# Altium PCB IEPE_PCB.PcbDoc
Units mm, origin at the board's own origin, x right, y up, seen from the top; angles counter-clockwise.
Board outline 36.69 x 60 mm, 2 copper layers (Top Layer, Bottom Layer); 86 components, 73 nets, 277 pads, 2 vias.
Unrouted connection lines stored in the file: 116.
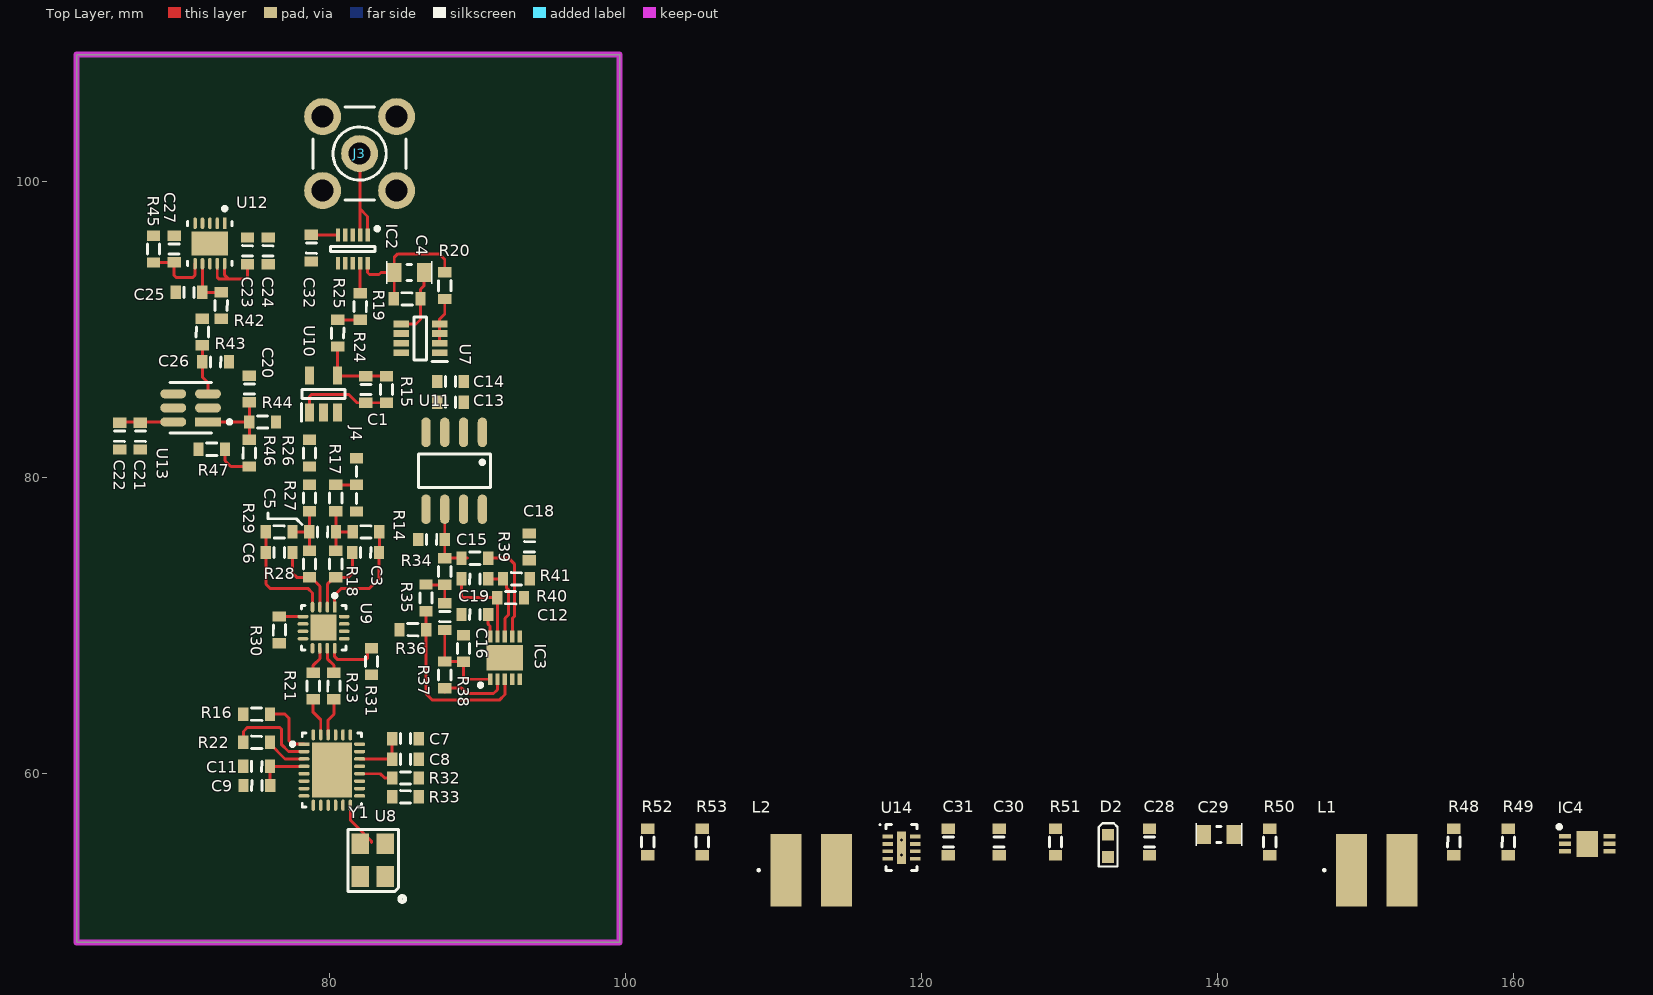
[diagram p0: Top Layer view]
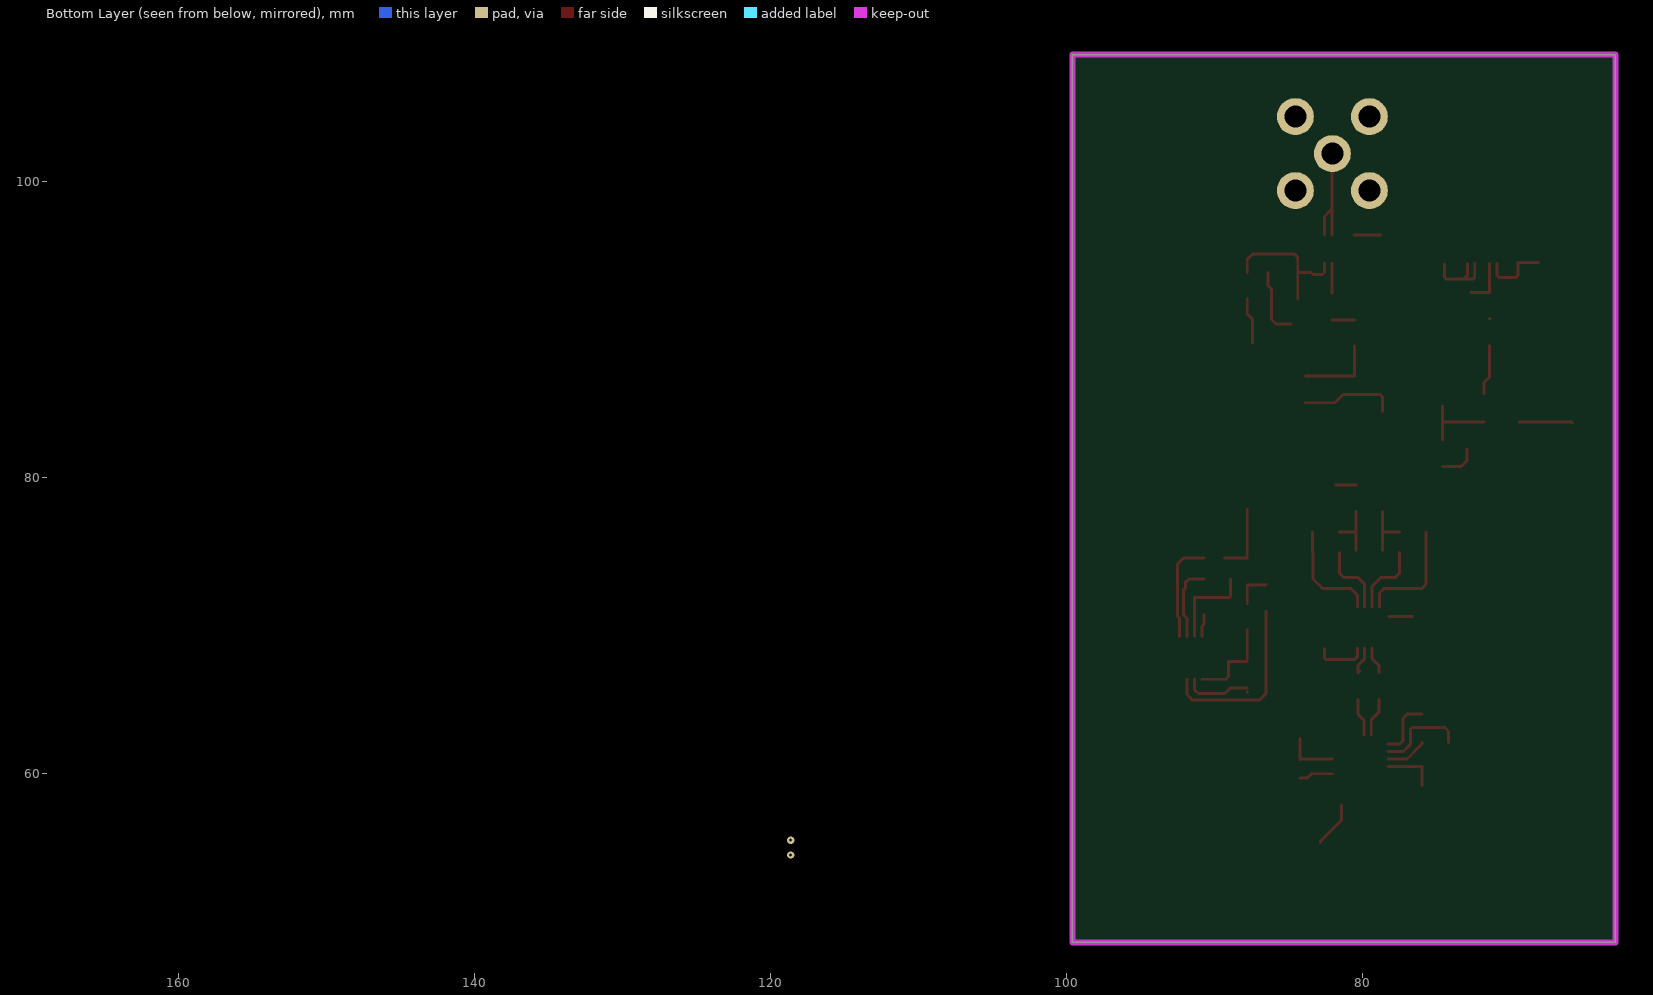
[diagram p1: Bottom Layer view, seen from below]

## Layer stack, top to bottom
Top Solder: solder mask 0.0102, Solder Resist, Dk 3.5
Top Layer: signal copper 0.0356
Dielectric 1: dielectric 0.32, FR-4, Dk 4.8
Bottom Layer: signal copper 0.0356
Bottom Solder: solder mask 0.0102, Solder Resist, Dk 3.5

## Board outline
62.875,48.585 62.875,108.585 99.568,108.585 99.568,48.585

## Design rules (kind name [scope] priority, off if disabled: settings)
Clearance [All] p1: gap=0.1 ignorepadtopadclearanceinfootprint=FALSE
MatchedLengths [InNetClass('QSPI')] p1: tolerance=2.54 checknetsindiffpair=FALSE checkdiffpairvsdiffpair=TRUE checkxsignals=TRUE checkothers=TRUE
PolygonConnect [All] p1: connectstyle=Relief reliefconductorwidth=0.254 reliefentries=4 polygonreliefangle="90 Angle" airgapwidth=0.254
RoutingVias [All] p1: holewidth=0.4 width=0.8 viastyle="Through Hole" minholewidth=0.4 minwidth=0.8 maxholewidth=0.5 maxwidth=1
SolderMaskExpansion [All] p1: expansion=0.102 istentingtop=FALSE
Width [All] p1: maxlimit=0.3 minlimit=0.2 preferedwidth=0.2
30 further rules are at their usual default settings.

## Classes and differential pairs
component class POWER: C28 C29 C30 C31 D2 IC4 L1 L2 R48 R49 R50 R51 R52 R53 U14
component class TOP: P1
component class IEPE1: C1 C3 C4 C5 C6 C7 C8 C9 C11 C12 C13 C14 C15 C16 C18 C19 C20 C21 C22 C23 C24 C25 C26 C27 C32 IC2 IC3 J3 J4 R14 R15 R16 R17 R18 R19 R20 R21 R22 R23 R24 R25 R26 R27 R28 R29 R30 R31 R32 R33 R34 R35 R36 R37 R38 R39 R40 R41 R42 R43 R44 R45 R46 R47 U7 U8 U9 U10 U11 U12 U13 Y1

## Components (designator, comment, footprint, x,y, rotation, side; value= is the part's Value field where it differs from the comment)
C1 "58pF" C603 82.423,85.955 r90 top
C3 "1000pF" C603 82.412,74.93 r0 top
C4 "10uF" C805 85.344,93.853 r0 top
C5 "1800pF" C603 79.502,76.327 r180 top
C6 "1000pF" C603 76.57,74.93 r180 top
C7 "1uF" C603 85.101,62.357 r0 top
C8 "100nF" C603 85.101,60.96 r0 top
C9 "1uF" C603 75.057,59.182 r180 top
C11 "100nF" C603 75.046,60.483 r180 top
C12 "470nF" C603 87.757,70.601 r90 top
C13 "100nF" C603 88.138,85.09 r180 top
C14 "1uF" C603 88.138,86.487 r180 top
C15 "100nF" C603 86.868,75.819 r180 top
C16 "100nF" C603 89.789,70.739 r180 top
C18 "22uF" C603 93.472,75.322 r90 top
C19 "4.7uF" C603 89.789,73.152 r0 top
C20 "1.5uF" C603 74.549,85.99 r270 top
C21 "100nF" C603 67.183,82.793 r270 top
C22 "1uF" C603 65.786,82.793 r270 top
C23 "100nF" C603 74.422,95.322 r90 top
C24 "2.2uF" C603 75.819,95.322 r90 top
C25 "100nF" C603 70.474,92.517 r180 top
C26 "3.3uF" C603 72.274,87.818 r0 top
C27 "10uF" C603 69.469,95.449 r90 top
C28 "47pF" c603 135.382,55.372 r90 top
C29 "4.7uF" C805 140.081,55.88 r0 top
C30 "1uF" c603 125.222,55.372 r90 top
C31 "470nF" c603 121.793,55.372 r90 top
C32 "100nF" C603 78.74,95.504 r270 top
D2 "LED" led-0603 132.588,54.356 r90 top
IC2 "ADG5421FBCPZ-RL7" SON50P200X300X80-10N-D 81.542,95.443 r270 top
IC3 "ADA4807-2ACPZ-R2" SON50P300X300X80-11N-D 91.821,67.818 r90 top
IC4 "LTC3459EDCB#PBF" SON50P300X200X80-7N-D 164.973,55.245 r0 top
J3 "CONN-2" SMB-ANT 82.002,101.894 r180 top
J4 "jumper" jumper-3-SMD 81.788,81.302 r180 top
L1 "VLCF5028T-330MR62-2" VLCF5028 150.749,53.467 r0 top
L2 "VLCF5028T-150MR85-2" VLCF5028 112.522,53.467 r0 top
R14 "2K" R0603 82.434,76.327 r180 top
R15 "15K" R0603 83.82,85.955 r90 top
R16 "10K" R0603 75.046,64.008 r0 top
R17 "750" R0603 80.391,78.613 r90 top
R18 "374" R0603 80.391,74.157 r90 top
R19 "10K" R0603 85.217,92.075 r0 top
R20 "270" R0603 87.757,92.964 r270 top
R21 "82.5" R0603 78.867,65.913 r90 top
R22 "0" R0603 75.046,62.103 r180 top
R23 "82.5" R0603 80.264,65.913 r90 top
R24 "0" R0603 82.042,91.556 r90 top
R25 "49.9K" R0603 80.518,89.756 r90 top
R26 "0" R0603 78.613,81.65 r90 top
R27 "750" R0603 78.613,78.613 r90 top
R28 "374" R0603 78.613,74.157 r90 top
R29 "2K" R0603 76.57,76.327 r0 top
R30 "2K" R0603 76.581,69.712 r90 top
R31 "2K" R0603 82.804,67.575 r90 top
R32 "0" R0603 85.101,59.69 r180 top
R33 "0" R0603 85.101,58.42 r180 top
R34 "3.3K" R0603 87.757,73.649 r90 top
R35 "3.3K" R0603 86.487,71.871 r90 top
R36 "10.2K" R0603 85.598,69.723 r180 top
R37 "100" R0603 87.757,66.664 r90 top
R38 "4.7K" R0603 89.019,68.453 r90 top
R39 "1K" R0603 89.789,74.549 r0 top
R40 "100" R0603 92.213,71.882 r0 top
R41 "1K" R0603 92.594,73.152 r0 top
R42 "4.7K" R0603 72.644,91.628 r270 top
R43 "50" R0603 71.374,89.839 r270 top
R44 "0" R0603 75.449,83.759 r0 top
R45 "100" R0603 68.072,95.438 r90 top
R46 "2.7K" R0603 74.549,81.65 r90 top
R47 "2.7K" R0603 72.009,81.915 r0 top
R48 "0" R0603 155.956,55.372 r90 top
R49 "1K" R0603 159.639,55.372 r90 top
R50 "1M" R0603 143.51,55.372 r90 top
R51 "210K" R0603 129.032,55.372 r90 top
R52 "3.9M" R0603 101.473,55.372 r90 top
R53 "78.7K" R0603 105.156,55.372 r90 top
U7 "LT3092ETS8#TRMPBF" SOT65P280X100-8N 86.106,89.408 r180 top
U8 "AD7768-1BCPZ" FP-CP-28-12-IPC_C 80.125,60.233 r0 top
U9 "ADA4945-1ACPZ-R7" FP-CP-16-22-IPC_C 79.568,69.856 r270 top
U10 "AD8605ARTZ-REEL7" SOT95P280X145-5N 79.568,85.655 r90 top
U11 "ADR4540BRZ" SOIC-8N 90.297,83.058 r270 top
U12 "LTC2606IDD-1#PBF" FP-DD-10-05-08-1699-IPC_C 71.882,95.819 r270 top
U13 "ADA4807-1ARJZ-R2" FP-RJ-6-IPC_A 70.58,84.709 r180 top
U14 "LT3494EDDB#TRMPBF" LT-DDB-8_V 118.618,54.991 r0 top
Y1 "50 MHz" OSC3225 83.742,53.045 r270 top

## Footprints (in the part's own frame and the unit in brackets; to place one, negate y for a bottom-side part, rotate by r counter-clockwise, add the part's x,y. Pads: shape width x height; smd on the part's side, far side on the other; paste and mask are expansions set on the pad)
C603 [mm]
  rect 0.7x0.9 smd: 1(-0.9,0) 2(0.9,0)
  silkscreen extent -0.35,-0.34 0.35,0.34, body extent -0.76,-0.38 0.76,0.38, height 0.6
c603 [mm]
  rect 0.7x0.9 smd: 1(-0.9,0) 2(0.9,0)
  silkscreen extent -0.35,-0.34 0.35,0.34, body extent -0.76,-0.38 0.76,0.38, height 0.6
C805 [mm]
  rect 0.95x1.3 smd: 1(-1,0) 2(1,0)
  silkscreen extent -1.52,-0.76 1.52,0.76, body extent -1,-0.62 1,0.63, height 0.78
FP-CP-16-22-IPC_C [mm]
  rect 0.731x0.239 smd paste+0 mask+0: 1(-1.391,0.75)
  rrect100% 0.731x0.239 smd paste+0 mask+0: 2(-1.391,0.25) 3(-1.391,-0.25) 4(-1.391,-0.75) 9(1.391,-0.75) 10(1.391,-0.25) 11(1.391,0.25) 12(1.391,0.75)
  rrect100% 0.239x0.731 smd paste+0 mask+0: 5(-0.75,-1.391) 6(-0.25,-1.391) 7(0.25,-1.391) 8(0.75,-1.391) 13(0.75,1.391) 14(0.25,1.391) 15(-0.25,1.391) 16(-0.75,1.391)
  rect 1.75x1.75 smd paste-1000 mask+0: 17(0,0)
  silkscreen extent -2.28,-1.5 1.5,1.5, body extent -1.86,-1.86 1.86,1.86, height 0.25
FP-CP-28-12-IPC_C [mm]
  rect 0.756x0.239 smd paste+0 mask+0: 1(-1.878,1.75)
  rrect100% 0.756x0.239 smd paste+0 mask+0: 2(-1.878,1.25) 3(-1.878,0.75) 4(-1.878,0.25) 5(-1.878,-0.25) 6(-1.878,-0.75) 7(-1.878,-1.25) 8(-1.878,-1.75) 15(1.878,-1.75) 16(1.878,-1.25) 17(1.878,-0.75) 18(1.878,-0.25) 19(1.878,0.25) 20(1.878,0.75) 21(1.878,1.25) 22(1.878,1.75)
  rrect100% 0.239x0.756 smd paste+0 mask+0: 9(-1.25,-2.378) 10(-0.75,-2.378) 11(-0.25,-2.378) 12(0.25,-2.378) 13(0.75,-2.378) 14(1.25,-2.378) 23(1.25,2.378) 24(0.75,2.378) 25(0.25,2.378) 26(-0.25,2.378) 27(-0.75,2.378) 28(-1.25,2.378)
  rect 2.7x3.7 smd paste-1000 mask+0: 29(0,0)
  silkscreen extent -2.78,-2.5 2,2.5, body extent -2.36,-2.86 2.36,2.86, height 0.25
FP-DD-10-05-08-1699-IPC_C [mm]
  rect 0.781x0.242 smd paste+0 mask+0: 1(-1.366,1)
  rrect100% 0.781x0.242 smd paste+0 mask+0: 2(-1.366,0.5) 3(-1.366,0) 4(-1.366,-0.5) 5(-1.366,-1) 6(1.366,-1) 7(1.366,-0.5) 8(1.366,0) 9(1.366,0.5) 10(1.366,1)
  rect 1.65x2.48 smd paste-1000 mask+0: 11(0,0)
  silkscreen extent -2.48,-1.5 1.5,1.5, body extent -1.86,-1.6 1.86,1.6, height 0.25
FP-RJ-6-IPC_A [mm]
  rect 1.756x0.612 smd paste+0 mask+0: 1(-1.175,0.95)
  rrect100% 1.756x0.612 smd paste+0 mask+0: 2(-1.175,0) 3(-1.175,-0.95) 4(1.175,-0.95) 5(1.175,0) 6(1.175,0.95)
  silkscreen extent -2.75,-1.7 1.4,1.7, body extent -2.55,-1.95 2.55,1.95, height 0.25
jumper-3-SMD [mm]
  rect 0.9x0.7 smd: 1(0,0) 2(0,1.8) 3(0,3.6)
  silkscreen extent -0.01,0.56 0.01,3.05, body extent -0.38,0.14 0.38,1.66, height 0.45
led-0603 [mm]
  rect 0.8x0.8 smd: 1(0,0) 2(1.5,0)
  silkscreen extent -0.64,-0.64 2.29,0.64, body extent -0.04,-0.41 1.56,0.38, height 0.7
LT-DDB-8_V [mm] "SON, 8-Leads, Body 3x2mm, Pitch 0.5mm, Thermal Pad 2.2x0.61mm"
  rect 0.7x0.25 smd mask+0.102: 1(-0.925,0.75) 2(-0.925,0.25) 3(-0.925,-0.25) 4(-0.925,-0.75) 5(0.925,-0.75) 6(0.925,-0.25) 7(0.925,0.25) 8(0.925,0.75)
  rect 0.61x2.2 smd mask+0.102: 9(0,0)
  silkscreen extent -1.5,-1.55 1.05,1.6, body extent -1,-1.5 1,1.5, height 0.8
OSC3225 [mm]
  rect 1.4x1.2 smd: 1(0,0) 2(-2.2,0) 3(-2.2,-1.7) 4(0,-1.7)
  silkscreen extent -3.17,-2.54 1.7,1.32, body extent -2.62,-2.14 0.58,0.36, height 1
R0603 [mm]
  rect 0.7x0.9 smd: 1(-0.9,0) 2(0.9,0)
  silkscreen extent -0.34,-0.42 0.34,0.42, body extent -0.76,-0.38 0.76,0.38, height 0.45
SMB-ANT [mm]
  round 2.5 hole 1.5: 1(0,0) 2(-2.5,2.5) 2(-2.5,-2.5) 2(2.5,2.5) 2(2.5,-2.5)
  silkscreen extent -3.15,-3.15 3.15,3.15, body extent -2.63,-11.37 2.57,2.63, height 9.9
SOIC-8N [mm] "SOIC, 8-Leads, Body 4.9x3.9mm, Pitch 1.27mm, IPC Low Density"
  oval 2x0.625 smd: 1(0,0) 2(0,-1.27) 3(0,-2.54) 4(0,-3.81) 5(5.2,-3.81) 6(5.2,-2.54) 7(5.2,-1.27) 8(5.2,0)
  silkscreen extent 1.48,-4.32 3.73,0.57, body extent -0.57,-4.43 5.6,0.57, height 2
SON50P200X300X80-10N-D [mm]
  rect 0.85x0.3 smd: 1(-0.95,1) 2(-0.95,0.5) 3(-0.95,0) 4(-0.95,-0.5) 5(-0.95,-1) 6(0.95,-1) 7(0.95,-0.5) 8(0.95,0) 9(0.95,0.5) 10(0.95,1)
  silkscreen extent -1.5,-1.5 0.18,1.78, body extent -1.05,-1.5 1.05,1.5, height 0.8
SON50P300X200X80-7N-D [mm]
  rect 0.8x0.3 smd: 1(-1.5,0.5) 2(-1.5,0) 3(-1.5,-0.5) 4(1.5,-0.5) 5(1.5,0) 6(1.5,0.5)
  rect 1.45x1.75 smd: 7(0,0)
  silkscreen extent -2.02,1.03 -1.77,1.27, body extent -1.55,-1 1.55,1, height 0.8
SON50P300X300X80-11N-D [mm]
  rect 0.8x0.3 smd: 1(-1.45,1) 2(-1.45,0.5) 3(-1.45,0) 4(-1.45,-0.5) 5(-1.45,-1) 6(1.45,-1) 7(1.45,-0.5) 8(1.45,0) 9(1.45,0.5) 10(1.45,1)
  rect 1.74x2.48 smd: 11(0,0)
  silkscreen extent -1.97,1.52 -1.73,1.77, body extent -1.55,-1.5 1.55,1.5, height 0.8
SOT65P280X100-8N [mm]
  rect 1.05x0.45 smd: 1(-1.3,0.975) 2(-1.3,0.325) 3(-1.3,-0.325) 4(-1.3,-0.975) 5(1.3,-0.975) 6(1.3,-0.325) 7(1.3,0.325) 8(1.3,0.975)
  silkscreen extent -1.83,-1.45 0.43,1.55, body extent -1.4,-1.45 1.4,1.45, height 1
SOT95P280X145-5N [mm]
  rect 1.2x0.6 smd: 1(-1.25,0.95) 2(-1.25,0) 3(-1.25,-0.95) 4(1.25,-0.95) 5(1.25,0.95)
  silkscreen extent -1.85,-1.45 0.3,1.5, body extent -1.4,-1.45 1.4,1.45, height 1.45
VLCF5028 [mm]
  rect 2.1x4.9 smd: 1(-1.7,0) 2(1.7,0)
  silkscreen extent -3.6,-0.05 -3.5,0.05, body extent -2.58,-2.5 2.58,2.5, height 2.8

## Part data
C1 C3 C4 C5 C6 C7 C8 C9 C11 C12 C13 C14 C15 C16 C18 C19 C20 C21 C22 C23 C24 C25 C26 C27 C28 C29 C30 C31 C32: library part Cap, "Capacitor", Designer="Parsa Malekpour"
IC2: "Integrated Circuit", Manufacturer_Name="Analog Devices", Mouser Part Number=584-ADG5421FBCPZ-RL7, Arrow Part Number=ADG5421FBCPZ-RL7, Arrow Price/Stock=https://www.arrow.com/en/products/adg5421fbcpz-rl7/analog-devices?region=nac, Datasheet Link=https://www.analog.com/ADG5421F/datasheet, Height=0.8mm, Manufacturer_Part_Number=ADG5421FBCPZ-RL7, Mouser Price/Stock=https://www.mouser.co.uk/ProductDetail/Analog-Devices/ADG5421FBCPZ-RL7?qs=T94vaHKWudQNcGWA2Nw7gg%3D%3D
IC3: "Integrated Circuit", Manufacturer_Name="Analog Devices", Mouser Part Number=584-ADA4807-2ACPZ-R2, Arrow Part Number=ADA4807-2ACPZ-R2, Arrow Price/Stock=null?region=nac, Datasheet Link=https://componentsearchengine.com/Datasheets/2/ADA4807-2ACPZ-R2.pdf, Height=0.8mm, Manufacturer_Part_Number=ADA4807-2ACPZ-R2, Mouser Price/Stock=https://www.mouser.co.uk/ProductDetail/Analog-Devices/ADA4807-2ACPZ-R2?qs=xbTpb2TSnD%2FWQQylmCBTow%3D%3D
IC4: "Integrated Circuit", Manufacturer_Name="Analog Devices", Mouser Part Number=584-LTC3459EDCB#PBF, Datasheet Link=https://eu.mouser.com/datasheet/2/609/3459fc-1268033.pdf, Height=0.8mm, Manufacturer_Part_Number=LTC3459EDCB#PBF, Mouser Price/Stock=https://www.mouser.co.uk/ProductDetail/Analog-Devices/LTC3459EDCBPBF?qs=oahfZPh6IAJQ4v4AGuZiZA%3D%3D
J4: library part "Triple Jumper", "Jumper wire"
L1: "Inductor", Manufacturer_Name=TDK, Mouser Part Number=810-VLCF528T330MR622, Datasheet Link=https://product.tdk.com/system/files/dam/doc/product/inductor/inductor/smd/catalog/inductor_commercial_power_vlcf5028-2_en.pdf, Manufacturer_Part_Number=VLCF5028T-330MR62-2, Mouser Price/Stock=https://www.mouser.co.uk/ProductDetail/TDK/VLCF5028T-330MR62-2?qs=uxmvvYJjMIsxJaGpQbGMMg%3D%3D
L2: "Inductor", Manufacturer_Name=TDK, Mouser Part Number=810-VLCF528T150MR852, Arrow Part Number=VLCF5028T-150MR85-2, Arrow Price/Stock=https://www.arrow.com/en/products/vlcf5028t-150mr85-2/tdk?region=nac, Datasheet Link=https://product.tdk.com/system/files/dam/doc/product/inductor/inductor/smd/catalog/inductor_commercial_power_vlcf5028-2_en.pdf, Manufacturer_Part_Number=VLCF5028T-150MR85-2, Mouser Price/Stock=https://www.mouser.co.uk/ProductDetail/TDK/VLCF5028T-150MR85-2?qs=uxmvvYJjMIszC3VRfNbrqA%3D%3D
R14 R15 R16 R17 R18 R19 R20 R21 R22 R23 R24 R25 R26 R27 R28 R29 R30 R31 R32 R33 R34 R35 R36 R37 R38 R39 R40 R41 R42 R43 R44 R45 R46 R47 R48 R49 R50 R51 R52 R53: library part Resistor, "Resistor", Designer="Parsa Malekpour"
U7: library part CMP-0472-00073-1, "200 mA Two-Terminal Programmable Current Source, 0.3 mA Isupply, 8-pin SOT23 (TS8-8), -40 to 125 degC, Pb-Free, Mini Tape and Reel", Extended Temp="E, I, MP", Manufacturer="Linear Technology", Output Current Range="0.5 mA to 200 mA", Code_JEDEC=MO-193, ComponentLink1Description="Manufacturer URL", ComponentLink1URL=http://www.linear.com/, ComponentLink2Description=Datasheet, ComponentLink2URL=http://cds.linear.com/docs/en/datasheet/3092fb.pdf, ComponentLink3Description="Package Specification", ComponentLink3URL=http://cds.linear.com/docs/en/packaging/SOT_8_05-08-1637.pdf, DatasheetVersion="Rev. B", Initial Accuracy(%)=1, Isupply(mA)=0.3, Mounting Technology="Surface Mount", PackageDescription="8-Pin Plastic TSOT-23, Body 2.9 x 1.63 mm, Pitch 0.65 mm", PackageReference=TS8-8, PackageVersion="Rev. A, 08/2010", Packing="Mini Tape and Reel", PartNumber=LT3092ETS8#TRMPBF, RoHS=TRUE, Vin Max(V)=40, Vin Min(V)=1.2
U8: library part CMP-09081-000087-1, "IC ADC 24BIT SIGMA-DELTA 28LFCSP", Max Operating Temperature=125°C, Min Operating Temperature=-40°C, Interface=SPI, Number of A/D Converters=1, Number of Bits=24, Number Of Inputs=1, Number of Pins=28, RoHS Compliant=Yes, Sampling Rate=1024000S/s
U9: "IC ADC DRIVER 16LFCSP", Number of Pins=16
U10: library part CMP-0384-01494-2, "Single Channel Wide Bandwidth Operational Amplifier, 10 MHz BW, 5 V/us SR, Industrial, 5-pin SOT23 (RJ-5), Reel", Amplifiers Per Package=1, Generic Part Number=AD8605, Input Bias Current=200fA, Input Offset Voltage=20uV, Manufacturer="Analog Devices", Code_JEDEC=MO-178-AA, ComponentLink1Description="Manufacturer URL", ComponentLink1URL=http://www.analog.com/en/index.html, ComponentLink2Description=Datasheet, ComponentLink2URL=http://www.analog.com/static/imported-files/data_sheets/AD8605_8606_8608.pdf, ComponentLink3Description="Package Specification", ComponentLink3URL=http://www.analog.com/static/imported-files/packages/PKG_PDF/SOT-23(RJ)/RJ_5.pdf, ComponentLink4Description="Reference Circuit", ComponentLink4URL=http://www.analog.com/en/all-operational-amplifiers-op-amps/operational-amplifiers-op-amps/ad8605/products/product.html#product-recommendations, DatasheetVersion="Rev. L", Iq/Amp=1.2mA, Mounting Technology="Surface Mount", PackageDescription="5-Pin Small Outline Transistor Package, Body 2.9 x 1.6 mm, Pitch 0.95 mm", PackageReference=RJ-5, PackageVersion=121608-A, PartNumber=AD8605ARTZ-REEL7, RevisionNote="Reference Circuit URL fixed", Slew Rate=5V/us, Small Signal Bandwidth=10MHz, V Span Max=6V, V Span Min=2.7V
U11: library part CMP-0784-00192-1, "Ultralow Noise, High Accuracy Voltage Reference, 4.096 V Output, 3 to 15 V Supply, Industrial, 8-pin SOIC (R-8), Tube", Manufacturer="Analog Devices", Operating Temp Range="-40 to 125 degC", Code_JEDEC=MS-012-AA, ComponentLink1Description="Manufacturer URL", ComponentLink1URL=http://www.analog.com/en/index.html, ComponentLink2Description=Datasheet, ComponentLink2URL=http://www.analog.com/static/imported-files/data_sheets/ADR4520_4525_4530_4533_4540_4550.pdf, ComponentLink3Description="Package Specification", ComponentLink3URL=http://www.analog.com/static/imported-files/packages/PKG_PDF/SOIC_Narrow%20(R)/R_8.pdf, ComponentLink4Description="URL Link1", ComponentLink4URL="Product URL:http://www.analog.com/en/special-linear-functions/voltage-references/adr4540/products/product.html", DatasheetVersion="Rev. 0", Max V Supply (V)=15, Min V Supply (V)=3, Mounting Technology="Surface Mount", PackageDescription="8-Pin Standard Small Outline Package, Body 4.9 x 3.9 mm, Pitch 1.27 mm", PackageReference=R-8, PackageVersion="060506-A, 06/2006", Packing=Tube, PartNumber=ADR4540BRZ, Ref Out TC (ppm/C)=2, Vout=4.096V
U12: library part CMP-09082-000079-1, "IC DAC 16BIT V-OUT 10DFN", Case/Package=DFN, Max Operating Temperature=85°C, Max Supply Voltage=5.5V, Min Operating Temperature=-40°C, Min Supply Voltage=2.7V, Nominal Supply Current=340uA, Package Quantity=121, Integral Nonlinearity (INL)=64LSB, Interface=I2C, Lead Free="Lead Free", Mount="Surface Mount", Number of Bits=16, Number of Channels=1, Number of Converters=1, Number of Pins=10, Output Type=Voltage, Packaging=Rail/Tube, REACH SVHC="No SVHC", Resolution=16b, RoHS Compliant=Yes, Settling Time=10us, Supply Current=340uA, Supply Type=Single
U13: library part CMP-09116-000179-1, "IC OPAMP VFB 1 CIRCUIT SOT23-6", Case/Package=SOT-23-6, Dual Supply Voltage=5V, Input Bias Current=1.2uA, Input Offset Voltage (Vos)=20uV, Max Frequency=100kHz, Max Input Voltage=11V, Max Operating Temperature=125°C, Min Input Voltage=2.7V, Min Operating Temperature=-40°C, Min Supply Voltage=3V, Operating Supply Current=950uA, Operating Supply Voltage=10V, Output Current=60mA, Output Current per Channel=106mA, Power Supply Rejection Ratio (PSRR)=105dB, Voltage Gain=130dB, -3db Bandwidth=180MHz, Bandwidth=200MHz, Common Mode Rejection Ratio=96dB, Contact Plating=Tin, Gain Bandwidth Product=200MHz, Height=1.3mm, Lead Free="Contains Lead", Length=3mm, Max Supply Voltage=11V, Mount="Surface Mount", Number of Amplifiers=1, Number Of Circuits=1, Number of Pins=6, Packaging="Cut Tape", REACH SVHC="No SVHC", RoHS Compliant=Yes, Slew Rate=225V/µs, Width=1.7mm
U14: library part CMP-0491-00356-1, "Micropower Low Noise Boost Converter with Output Disconnect, 8-pin SON (DDB-8), -40 to 85 degC, Pb-Free, Mini Tape and Reel", Manufacturer="Linear Technology", Code_JEDEC=MO-229, ComponentLink1Description="Manufacturer URL", ComponentLink1URL=http://www.linear.com/, ComponentLink2Description=Datasheet, ComponentLink2URL=http://cds.linear.com/docs/en/datasheet/3494fb.pdf, ComponentLink3Description="Package Specification", ComponentLink3URL=http://cds.linear.com/docs/en/packaging/DFN_8_05-08-1702.pdf, DatasheetVersion="Rev. B", Mounting Technology="Surface Mount", Number Of Outputs=1, PackageDescription="8-Pin Plastic DFN, Body 3 x 2 mm, Pitch 0.5 mm", PackageReference=DDB-8, PackageVersion="Rev. B, 06/2010", Packing="Mini Tape and Reel", PartNumber=LT3494EDDB#TRMPBF, RoHS=TRUE
Y1: library part OSCILLATOR, "OSCILLATOR", Frequency="50 MHz"

## Via types
v1: diameter 0.5, hole 0.2, Top Layer to Bottom Layer, 2 vias

## Nets (pads, with @x,y where several pads share a name; then routed paths per layer and width w, separated by ;. In a path a pad name is that pad's centre, name@x,y a point inside that pad or via, vN(x,y) a via of type N, cw(c..) or ccw(c..) an arc to the next point about the centre after c; other vN are vias at no path point)
3V3_DAC: C23.1 C24.1 U12.9 U12.10 | length 5.1
  Top Layer w0.2: U12.9 72.382,93.541 72.517,93.406 73.152,93.406 ; U12.10 72.882,93.676 73.152,93.406 ; C23.1 74.422,93.523 74.305,93.406 73.152,93.406
+3.3V: C30.2 IC4.1 IC4.6 L1.1 L2.1 U8.22 U14.3 U14.4 U14.5
+5V: C13.1 C14.1 C16.1 C21.1 C22.1 IC3.10 R30.1 R31.1 U8.23 U9.6 U9.7 U9.8 U10.5 U11.2 U13.6 | length 5.2
  Top Layer w0.2: C22.1 65.852,83.759 U13.6 ; C16.1 90.689,70.093 90.821,69.961 IC3.10
+7V: R48.2 R49.1
+26V: C32.1 IC2.5 U7.7 U7.8 | length 1.8
  Top Layer w0.2: C32.1 78.751,96.393 IC2.5
ADC_GPIO0: IC2.8 U8.15
ADC_GPIO1: IC2.7 U8.16
ADC_GPIO2: R33.2 U8.17
ADC_GPIO3: R32.2 U8.18 | length 2.3
  Top Layer w0.2: U8.18 83.4,59.983 83.693,59.69 R32.2
ADC_REF: C15.1 R34.2 R39.1 U11.6 | length 4.8
  Top Layer w0.2: U11.6 87.757,75.819 R34.2 89.281,74.549
ADC_RESET: R16.2 U8.1 | length 4
  Top Layer w0.2: R16.2 76.962,64.008 77.216,63.754 77.216,62.23 77.463,61.983 U8.1
DAC_BUF_EN: IC3.5 IC3.6 U13.5
DAC_OUT: C25.1 R42.1 U12.7 | length 3.2
  Top Layer w0.2: C25.1 C25.1@71.382,92.517 ; U12.7 C25.1@71.382,92.517 ; R42.1 72.633,92.517 C25.1@71.382,92.517
FDA_EN: R31.2 R33.1 U9.12 | length 3.6
  Top Layer w0.2: U9.12 80.318,67.891 80.518,67.691 82.423,67.691 82.55,67.818 R31.2@82.55,68.453
FDA_MODE: R30.2 R32.1 U9.5 | length 1.6
  Top Layer w0.2: R30.2 76.587,70.606 U9.5
FDA_OUT_N: R23.2 U9.11 | length 2
  Top Layer w0.2: U9.11 79.818,67.756 80.264,67.31 R23.2 R23.2@80.137,66.94
FDA_OUT_P: R21.2 U9.10 | length 1.8
  Top Layer w0.2: R21.2 78.867,67.31 79.318,67.761 U9.10
GND: C7.2 C8.2 C9.2 C11.2 C13.2 C14.2 C15.2 C16.2 C18.2 C21.2 C22.2 C23.2 C24.2 C25.2 C26.2 C27.2 C29.1 C30.1 C31.1 C32.2 D2.2 IC2.4 IC2.6 IC3.4 IC3.11 IC4.5 IC4.7 J3.2 R36.2 R38.2 R47.1 R51.1 U8.7 U8.8 U8.13 U8.21 U8.25 U8.29 U9.13 U9.14 U9.15 U9.16 U9.17 U10.2 U11.4 U12.1 U12.4 U12.5 U12.8 U12.11 U13.2 U14.2 U14.9 Y1.2
  other v1: 118.618,54.491 118.618,55.491
IN: IC2.1 IC2.2 J3.1 | length 7.5
  Top Layer w0.2: J3.1 82.022,101.874 82.022,98.171 ; IC2.2 82.022,96.413 82.022,98.171 ; IC2.1 82.542,97.651 82.022,98.171
IOREF: R16.1 U8.5 U8.6 Y1.1 Y1.4
MCLK: U8.14 Y1.3 | length 3.1
  Top Layer w0.2: U8.14 81.375,56.85 82.795,55.43 82.795,55.33
NetC1_1: C1.1 R15.1 R26.2 U10.1 | length 6.5
  Top Layer w0.2: U10.1@78.618,84.455 78.618,85.476 78.74,85.598 81.28,85.598 81.823,85.055 C1.1 R15.1
NetC1_2: C1.2 R15.2 R25.1 U10.4 | length 5.3
  Top Layer w0.2: R25.1@80.518,88.889 80.518,86.855 C1.2 R15.2
NetC3_1: C3.1 R18.1 U9.2 | length 5
  Top Layer w0.2: U9.2 79.818,72.784 80.291,73.257 R18.1 81.258,73.257 81.512,73.511 C3.1
NetC3_2: C3.2 R14.1 U9.1 | length 7.4
  Top Layer w0.2: U9.1 80.318,72.063 80.772,72.517 82.677,72.517 83.312,73.152 C3.2 83.334,74.952 R14.1
NetC4_1: C4.1 IC2.10 R19.1 R20.1 | length 9.9
  Top Layer w0.2: IC2.10 82.542,93.861 82.677,93.726 83.312,93.726 83.439,93.853 C4.1 ; R19.1 84.344,92.102 C4.1 ; R20.1 87.757,94.742 87.376,95.123 84.582,95.123 84.344,94.885 C4.1
NetC4_2: C4.2 R19.2 U7.5 | length 4.7
  Top Layer w0.2: U7.5@84.796,90.383 85.811,90.383 86.117,90.689 R19.2 86.117,92.721 86.36,92.964 86.36,93.837 C4.2
NetC5_1: C5.1 R14.2 R17.1 R18.2 | length 3.8
  Top Layer w0.2: R18.2 R17.1 ; C5.1 R14.2
NetC5_2: C5.2 R27.1 R28.2 R29.2 | length 3.8
  Top Layer w0.2: R29.2 C5.2 ; R28.2 R27.1
NetC6_1: C6.1 R28.1 U9.3 | length 5
  Top Layer w0.2: C6.1 77.47,73.533 77.746,73.257 R28.1 78.713,73.257 79.318,72.652 U9.3
NetC6_2: C6.2 R29.1 U9.4 | length 7.9
  Top Layer w0.2: R29.1 C6.2 75.67,72.793 75.946,72.517 78.496,72.517 78.818,72.195 U9.4
NetC7_1: C7.1 C8.1 U8.20 | length 3.6
  Top Layer w0.2: U8.20 84.178,60.983 C8.1 C7.1
NetC9_1: C9.1 C11.1 U8.4 | length 3.6
  Top Layer w0.2: C9.1@75.946,59.182 C11.1 U8.4
NetC12_2: C12.2 R34.1 R35.2 | length 2.5
  Top Layer w0.2: R35.2 86.509,72.749 R34.1 C12.2
NetC19_1: C19.1 IC3.9 R40.1 | length 6.2
  Top Layer w0.2: C19.1 88.889,71.999 89.006,71.882 R40.1 91.313,70.612 91.321,70.604 IC3.9
NetC19_2: C19.2 IC3.8 R41.1 | length 5.2
  Top Layer w0.2: C19.2 R41.1 91.944,72.902 91.944,72.521 92.075,72.39 92.075,70.739 91.821,70.485 IC3.8
NetC20_1: C20.1 R42.2 R43.1 | length 0
  Top Layer w0.2: R43.1@71.341,90.706 R43.1
NetC20_2: C20.2 R44.1 R46.2 U13.1 | length 5.1
  Top Layer w0.2: U13.1 R44.1 ; R46.2 R44.1 ; C20.2@74.549,84.836 R44.1
NetC26_1: C26.1 R43.2 U13.3 | length 3.4
  Top Layer w0.2: R43.2 C26.1 71.374,86.802 71.755,86.421 U13.3
NetC27_1: C27.1 R45.1 U12.6 | length 4.6
  Top Layer w0.2: R45.1 69.458,94.538 C27.1 69.469,93.66 69.596,93.533 70.739,93.533 70.882,93.676 U12.6
NetC28_1: C28.1 IC4.3 R50.1 R51.2
NetC28_2: C28.2 C29.2 IC4.2 R48.1 R50.2
NetC31_2: C31.2 U14.8
NetD2_1: D2.1 R49.2
NetIC2_9: IC2.9 R24.2 | length 2
  Top Layer w0.2: R24.2 IC2.9
NetIC3_2: IC3.2 R37.1 | length 4.5
  Top Layer w0.2: R37.1@87.757,65.51 R37.1@87.76,65.513 ; R37.1 88.9,65.764 89.259,65.405 91.059,65.405 91.321,65.667 IC3.2
NetIC3_3: IC3.3 R35.1 R36.1 | length 12.3
  Top Layer w0.2: R35.1 86.487,69.734 R36.1 86.498,65.394 86.936,64.956 91.44,64.956 91.821,65.337 IC3.3
NetIC3_7: IC3.7 R39.2 | length 6.9
  Top Layer w0.2: R39.2 92.075,74.549 92.456,74.168 92.456,70.612 92.321,70.477 IC3.7
NetIC4_4: IC4.4 L1.2
NetL2_2: L2.2 U14.1
NetR20_2: R20.2 U7.2 U7.3 U7.4 | length 3.1
  Top Layer w0.2: U7.2@87.416,89.083 87.416,89.733 87.416,90.383 87.416,90.718 87.757,91.059 R20.2
NetR21_1: R21.1 U8.27 | length 2.6
  Top Layer w0.2: R21.1 78.867,64.135 79.375,63.627 U8.27
NetR22_2: R22.2 U8.2 | length 6.2
  Top Layer w0.2: R22.2 74.146,62.843 74.422,63.119 76.591,63.119 76.708,63.002 76.708,61.976 77.201,61.483 U8.2
NetR23_1: R23.1 U8.26 | length 2.6
  Top Layer w0.2: U8.26 79.875,63.619 80.264,64.008 R23.1
NetR24_1: R24.1 R25.2 | length 1.5
  Top Layer w0.2: R25.2 R24.1
NetR26_1: R26.1 R27.2
NetR46_1: R46.1 R47.2 U13.4 | length 2.6
  Top Layer w0.2: R47.2 72.909,81.142 73.301,80.75 R46.1
NetR52_1: R52.1 U14.6
NetR52_2: R52.2 R53.1
NetR53_2: R53.2 U14.7
REF_P: C18.1 R40.2 R41.2 U8.24
SCL: U12.3
SDA: U12.2
SHIFT: R44.2 U10.3
SPI_CS: U8.12
SPI_INT: U8.19
SPI_MISO: U8.9
SPI_MOSI: U8.11
SPI_SCK: U8.10
SYNC_OUT: R22.1 U8.3 | length 2.8
  Top Layer w0.2: R22.1 75.946,62.003 76.966,60.983 U8.3
VOCM: C12.1 IC3.1 J4.1 R37.2 R38.1 | length 6.3
  Top Layer w0.2: C12.1 R37.2 87.768,67.553 R38.1 89.019,66.548 89.199,66.368 IC3.1
VOCM_ADC: J4.3 U8.28
VOCM_REF: J4.2 R17.2 R45.2 | length 1.4
  Top Layer w0.2: R17.2 80.402,79.502 J4.2
pads on no net: IC2.3 U7.1 U7.6 U9.9 U11.1 U11.3 U11.5 U11.7 U11.8

## Keep-outs
Keep-Out Layer:
  the board outline again, w0.4

## Silkscreen, mask and mechanical layers (free items; w line width, h text height)
Top Overlay:
  lines w0.2: 75.819,77.597 75.819,77.216 77.724,77.216 78.105,76.835